# Altium PCB HBridge.PcbDoc
Units mil, origin at the board's own origin, x right, y up, seen from the top; angles counter-clockwise.
Board outline 2195 x 1561.19 mil, 4 copper layers (Top Layer, Second Layer, Third Layer, Fourth Layer), stack 59.526 mil thick; 54 components, 27 nets, 172 pads, 273 vias.
Unrouted connection lines stored in the file: 13.
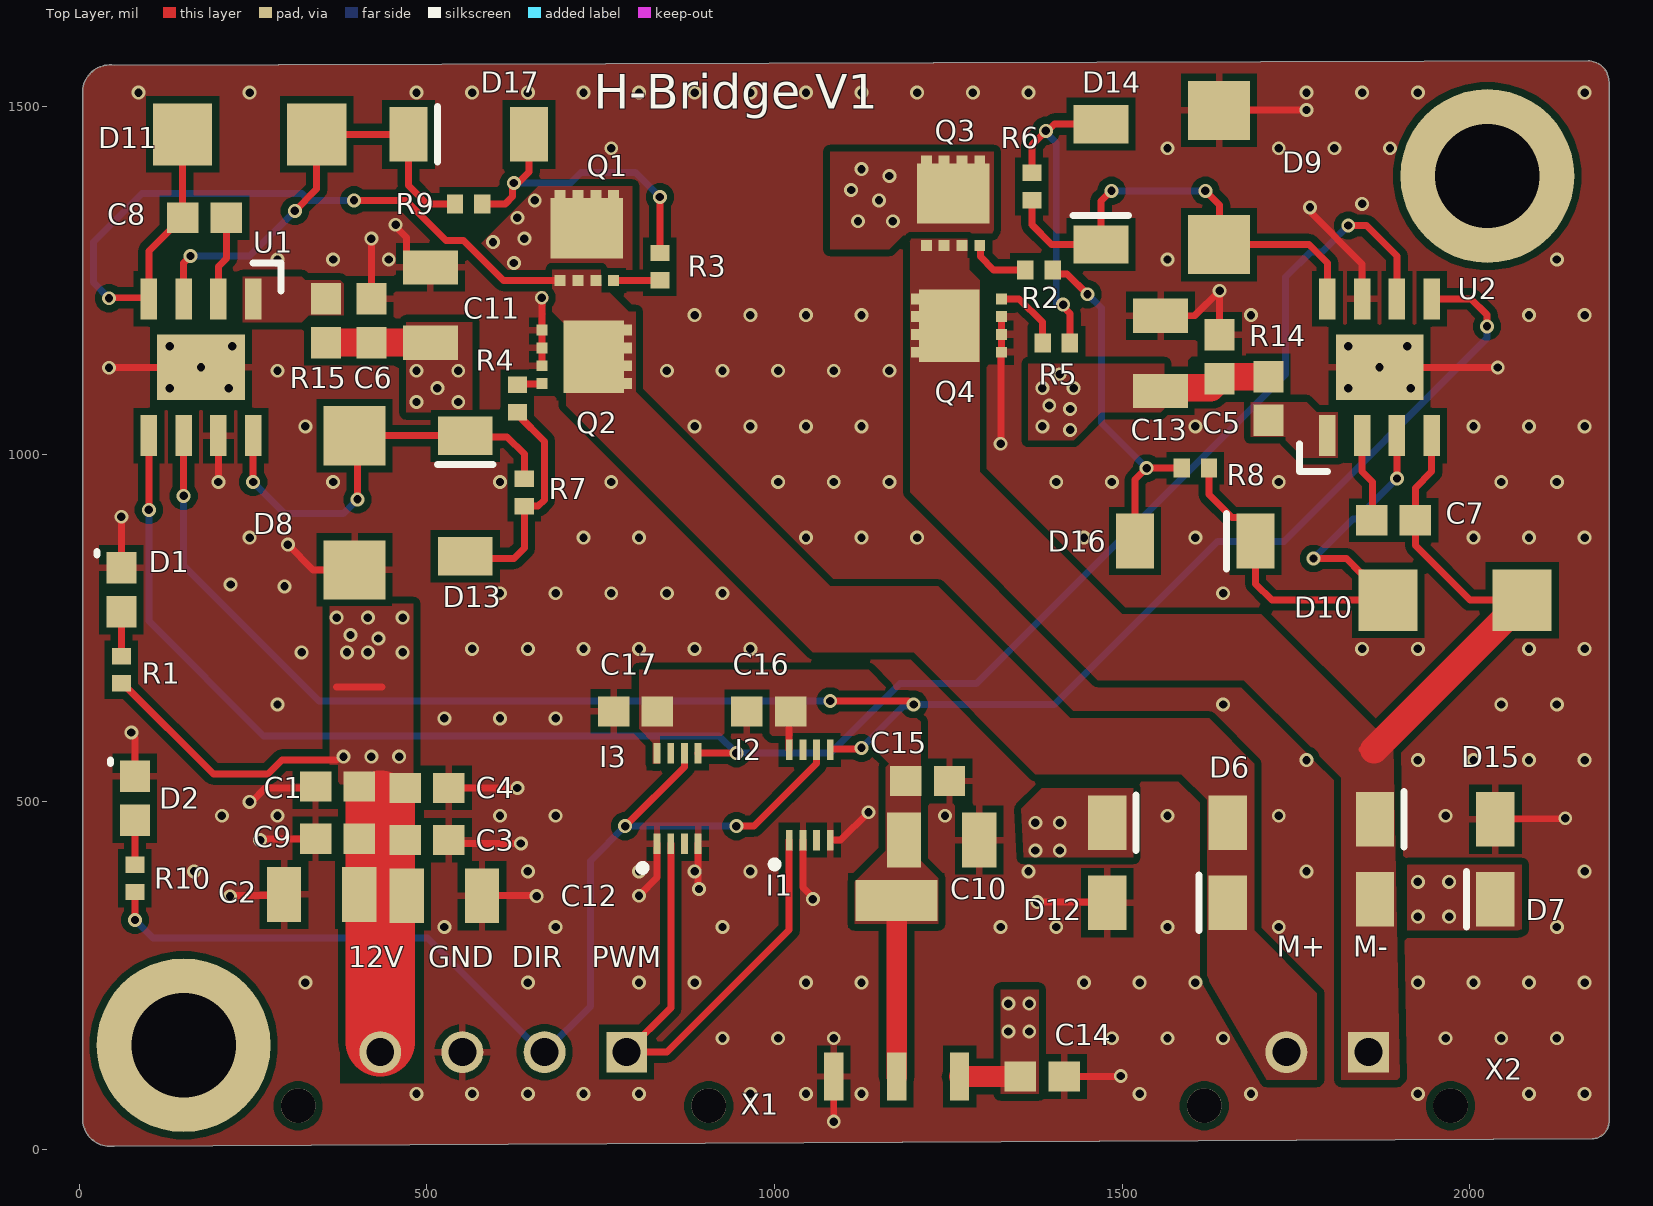
[diagram p0: Top Layer view]
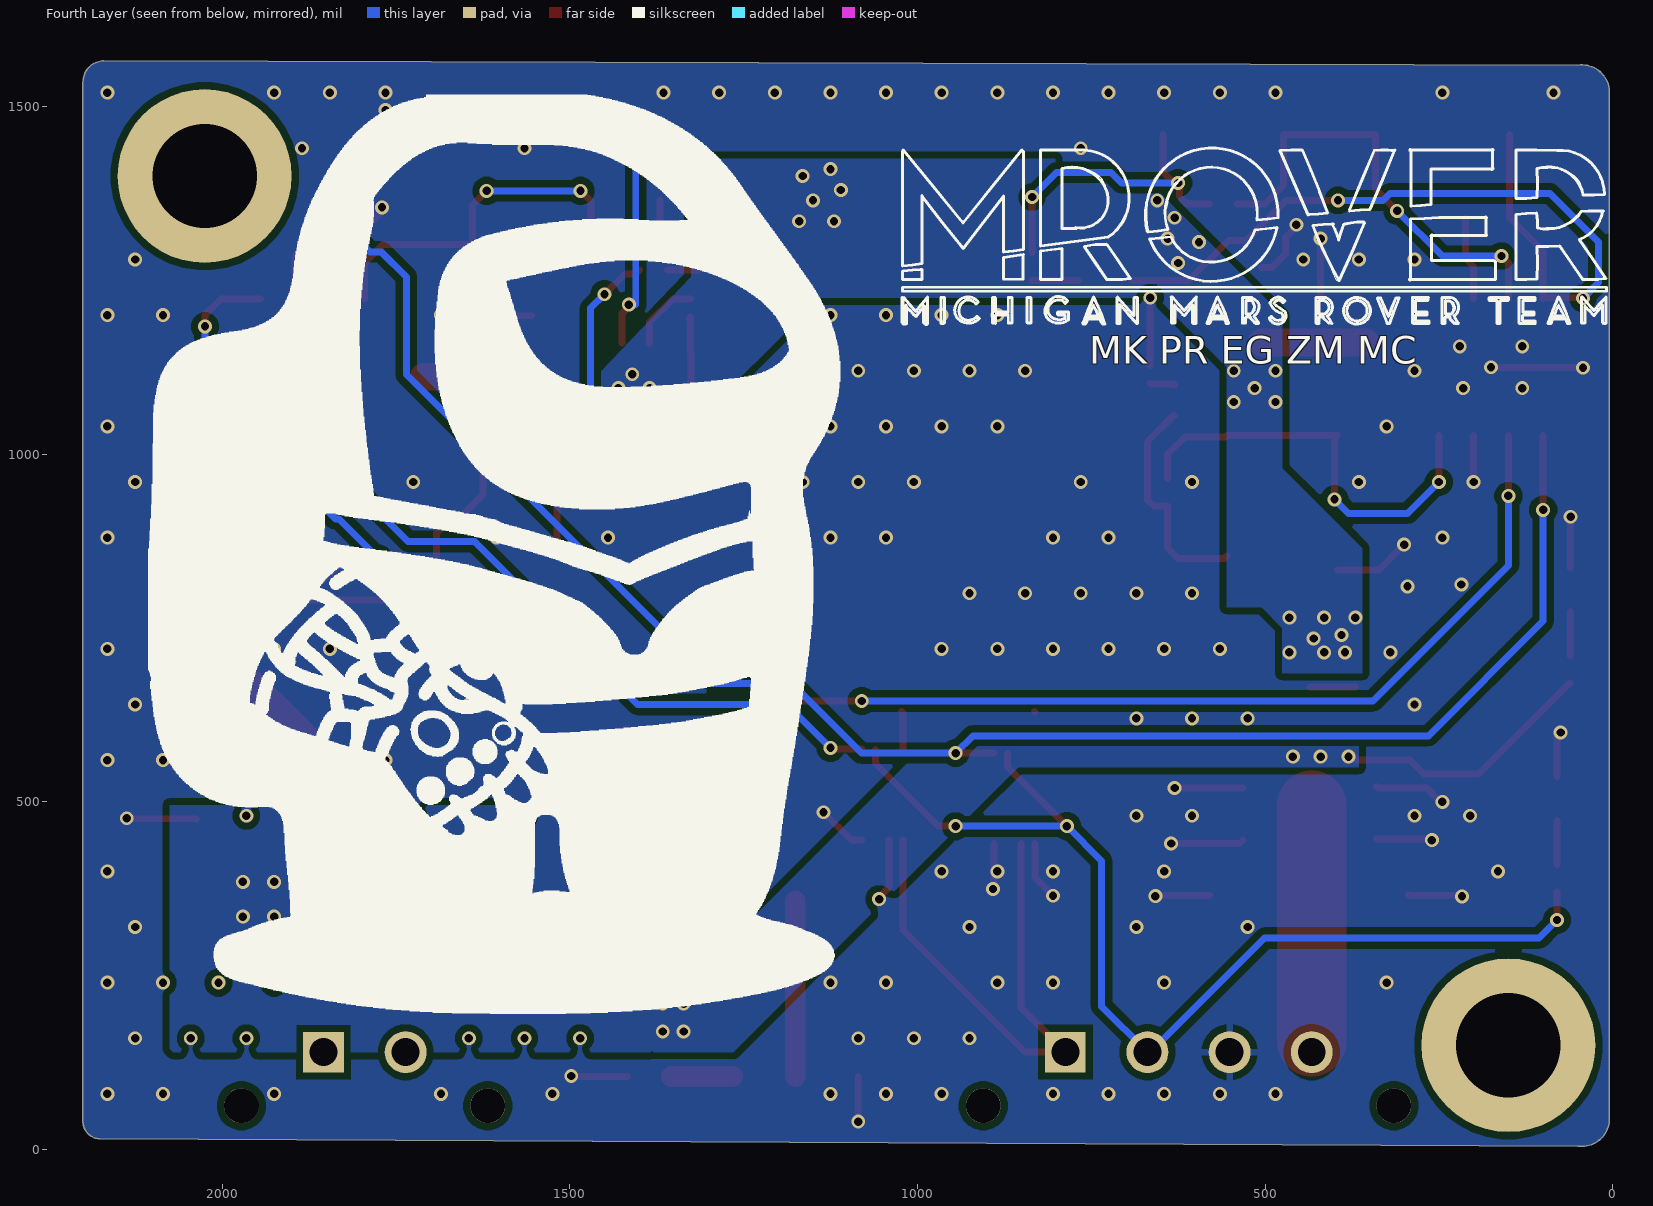
[diagram p1: Fourth Layer view, seen from below]
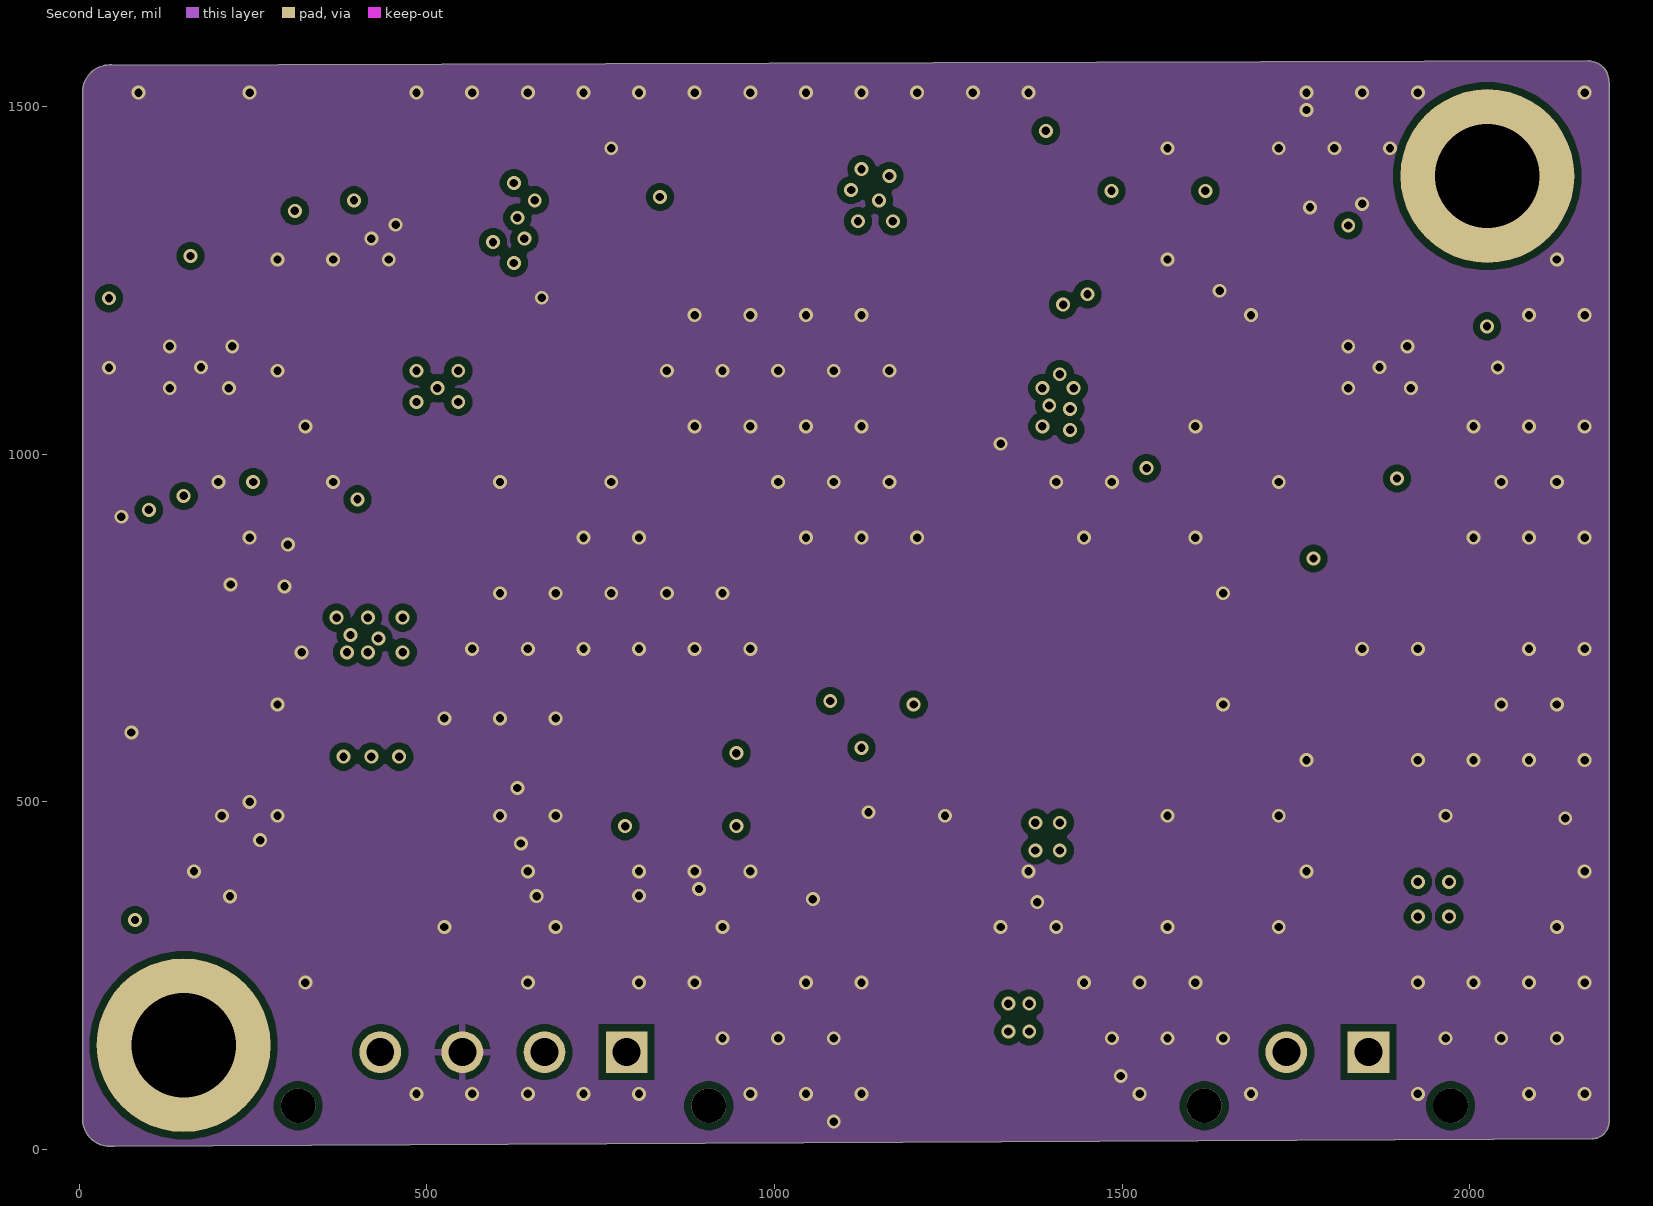
[diagram p2: Second Layer]
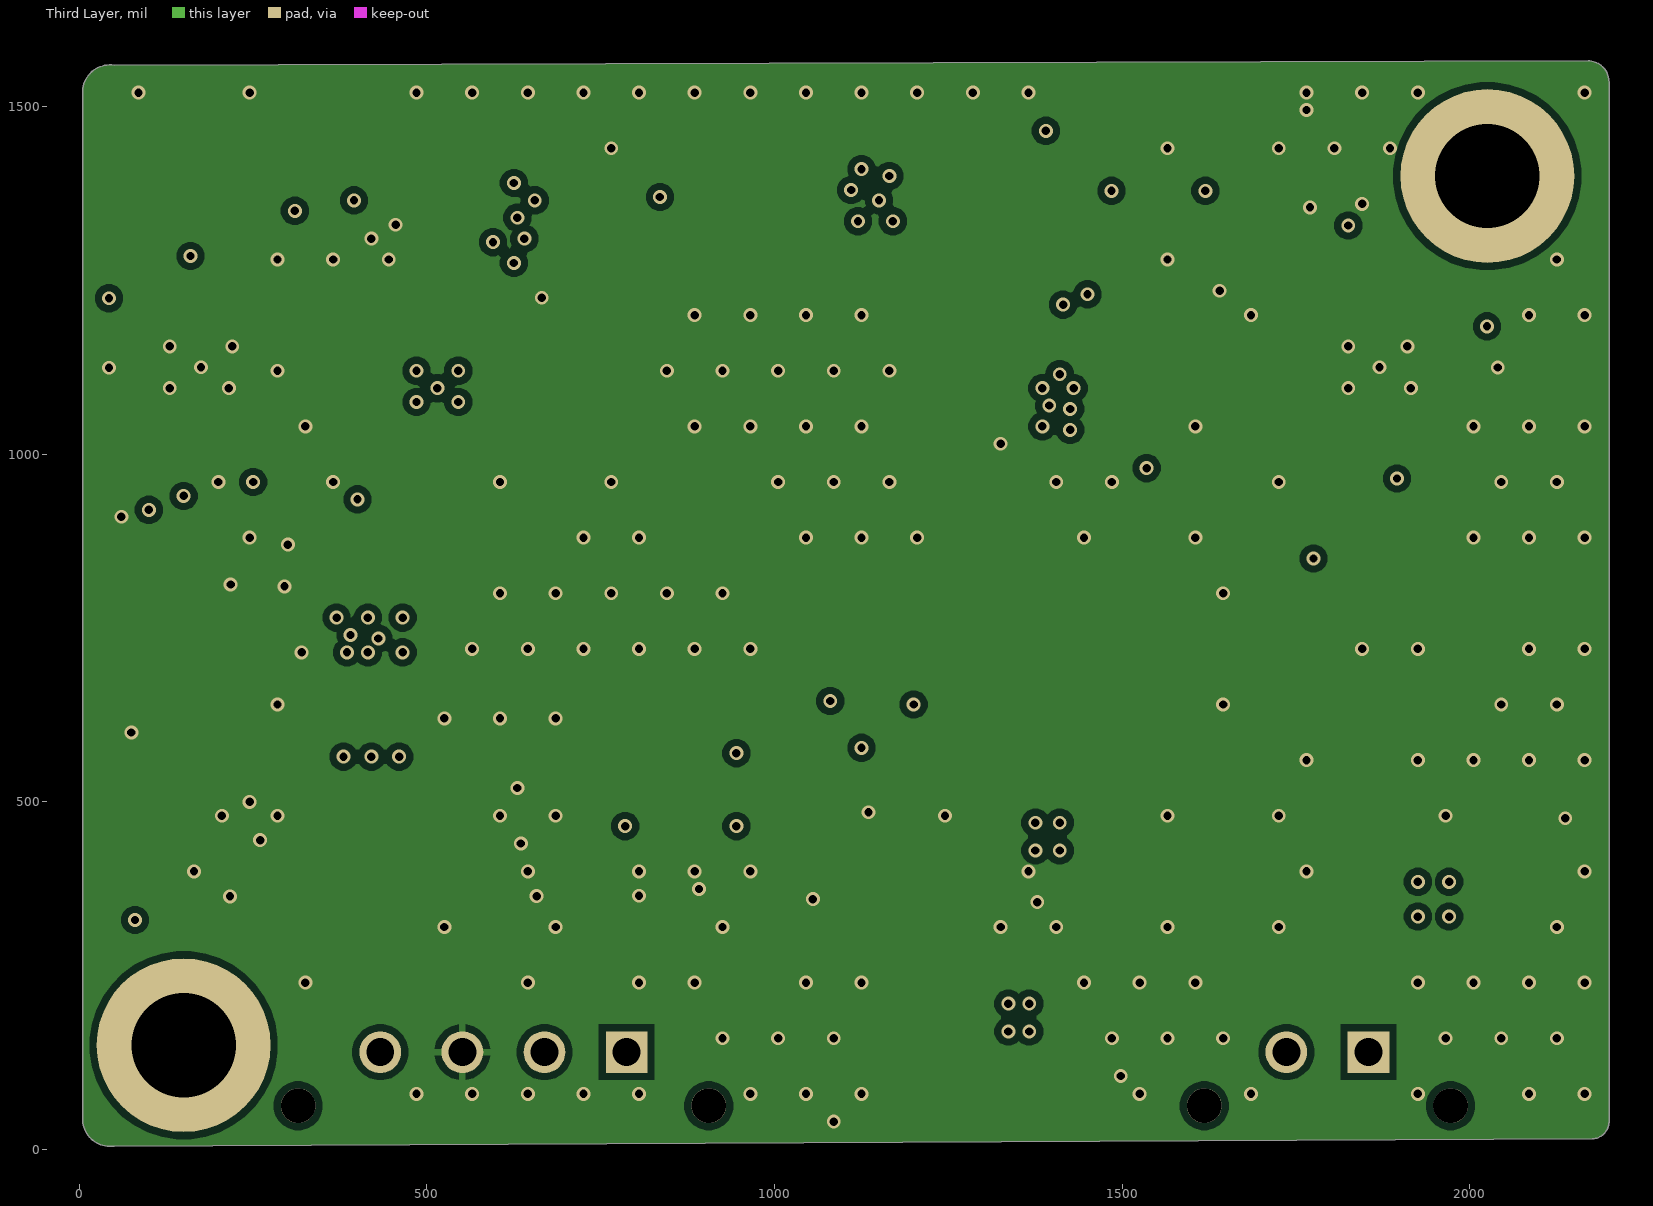
[diagram p3: Third Layer]
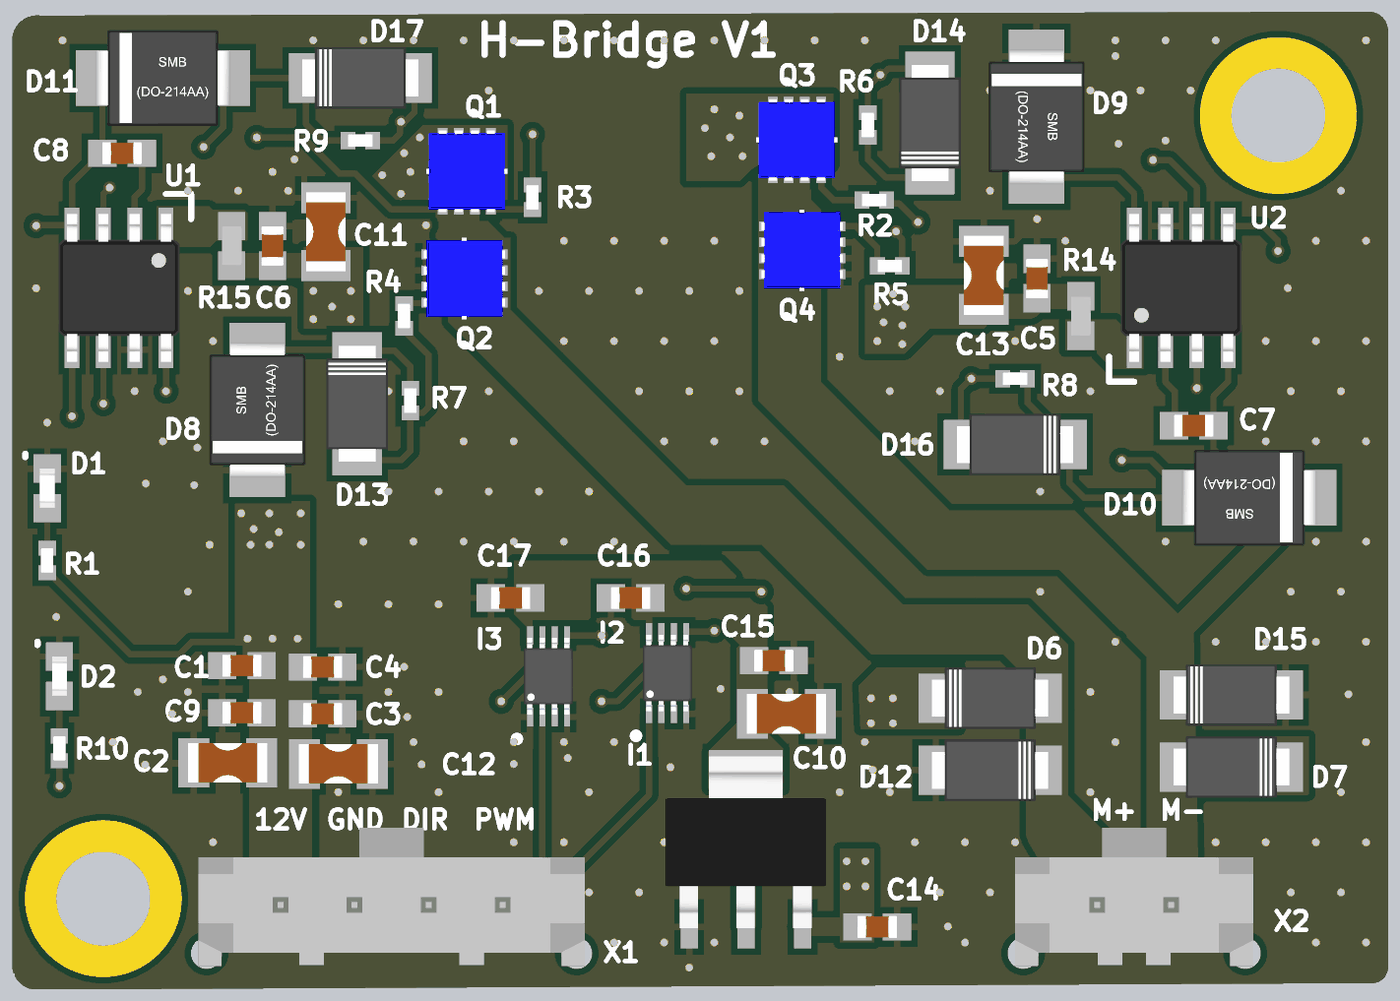
[diagram p4: 3D render of the assembled board from above, using the file's embedded part models]

## Layer stack, top to bottom
Top Solder: solder mask 0.4, Solder Resist, Dk 3.5
Top Layer: signal copper 1.4
Dielectric 2: prepreg 7.3, PP-006, Dk 4.16
Second Layer: signal copper 1.378
Dielectric 1: core 39.37, Core-009, Dk 4.5
Third Layer: signal copper 1.378
Dielectric 3: prepreg 7.3, PP-006, Dk 4.16
Fourth Layer: signal copper 1.4
Bottom Solder: solder mask 0.4, Solder Resist, Dk 3.5

## Board outline
5,38.52 5,1525.99 cw(c44.26,1520.25) 50,1559.52 2170,1565.78 cw(c2169.61,1535.39) 2200,1535 2200,41.77 cw(c2174.8,40.46) 2176.12,15.26 50,5 cw(c44.26,44.26)

## Design rules (kind name [scope] priority, off if disabled: settings)
Clearance [All] p1: gap=10 ignorepadtopadclearanceinfootprint=FALSE except(0: Arc-Hole Track-Hole SMDPad-Hole THPad-Hole Via-Hole Fill-Hole Poly-Hole Region-Hole Text-Hole; 8: Arc-Arc Arc-Track Track-Track; 9: Arc-SMDPad Track-SMDPad SMDPad-SMDPad)
HoleSize [All] p1: absolutevalues=TRUE maxlimit=200 minlimit=1 maxpercent=80.000 minpercent=20.000
PolygonConnect PolygonConnect_11 [All vs IsNamedPolygon('GND_L04_P035')] p1: thpad.connectstyle=Relief thpad.reliefconductorwidth=10 thpad.reliefentries=4 thpad.polygonreliefangle="90 Angle" thpad.airgapwidth=10 smdpad.connectstyle=Relief smdpad.reliefconductorwidth=10 smdpad.reliefentries=4 smdpad.polygonreliefangle="90 Angle" smdpad.airgapwidth=10 via.connectstyle=Direct via.reliefconductorwidth=10 via.reliefentries=4 via.polygonreliefangle="90 Angle" via.airgapwidth=10
PolygonConnect PolygonConnect_10 [All vs IsNamedPolygon('GND_L03_P033')] p2: thpad.connectstyle=Relief thpad.reliefconductorwidth=10 thpad.reliefentries=4 thpad.polygonreliefangle="90 Angle" thpad.airgapwidth=10 smdpad.connectstyle=Relief smdpad.reliefconductorwidth=10 smdpad.reliefentries=4 smdpad.polygonreliefangle="90 Angle" smdpad.airgapwidth=10 via.connectstyle=Direct via.reliefconductorwidth=10 via.reliefentries=4 via.polygonreliefangle="90 Angle" via.airgapwidth=10
PolygonConnect PolygonConnect_9 [All vs IsNamedPolygon('GND_L02_P034')] p3: thpad.connectstyle=Relief thpad.reliefconductorwidth=10 thpad.reliefentries=4 thpad.polygonreliefangle="90 Angle" thpad.airgapwidth=10 smdpad.connectstyle=Relief smdpad.reliefconductorwidth=10 smdpad.reliefentries=4 smdpad.polygonreliefangle="90 Angle" smdpad.airgapwidth=10 via.connectstyle=Direct via.reliefconductorwidth=10 via.reliefentries=4 via.polygonreliefangle="90 Angle" via.airgapwidth=10
PolygonConnect PolygonConnect_8 [All vs IsNamedPolygon('GND_L01_P037')] p4: thpad.connectstyle=Relief thpad.reliefconductorwidth=10 thpad.reliefentries=4 thpad.polygonreliefangle="90 Angle" thpad.airgapwidth=10 smdpad.connectstyle=Relief smdpad.reliefconductorwidth=10 smdpad.reliefentries=4 smdpad.polygonreliefangle="90 Angle" smdpad.airgapwidth=10 via.connectstyle=Direct via.reliefconductorwidth=10 via.reliefentries=4 via.polygonreliefangle="90 Angle" via.airgapwidth=10
PolygonConnect PolygonConnect_7 [All vs IsNamedPolygon('GND_L04_P035')] p5: thpad.connectstyle=Relief thpad.reliefconductorwidth=10 thpad.reliefentries=4 thpad.polygonreliefangle="90 Angle" thpad.airgapwidth=10 smdpad.connectstyle=Relief smdpad.reliefconductorwidth=10 smdpad.reliefentries=4 smdpad.polygonreliefangle="90 Angle" smdpad.airgapwidth=10 via.connectstyle=Direct via.reliefconductorwidth=10 via.reliefentries=4 via.polygonreliefangle="90 Angle" via.airgapwidth=10
PolygonConnect PolygonConnect_6 [All vs IsNamedPolygon('GND_L03_P033')] p6: thpad.connectstyle=Relief thpad.reliefconductorwidth=10 thpad.reliefentries=4 thpad.polygonreliefangle="90 Angle" thpad.airgapwidth=10 smdpad.connectstyle=Relief smdpad.reliefconductorwidth=10 smdpad.reliefentries=4 smdpad.polygonreliefangle="90 Angle" smdpad.airgapwidth=10 via.connectstyle=Direct via.reliefconductorwidth=10 via.reliefentries=4 via.polygonreliefangle="90 Angle" via.airgapwidth=10
PolygonConnect PolygonConnect_5 [All vs IsNamedPolygon('GND_L02_P034')] p7: thpad.connectstyle=Relief thpad.reliefconductorwidth=10 thpad.reliefentries=4 thpad.polygonreliefangle="90 Angle" thpad.airgapwidth=10 smdpad.connectstyle=Relief smdpad.reliefconductorwidth=10 smdpad.reliefentries=4 smdpad.polygonreliefangle="90 Angle" smdpad.airgapwidth=10 via.connectstyle=Direct via.reliefconductorwidth=10 via.reliefentries=4 via.polygonreliefangle="90 Angle" via.airgapwidth=10
PolygonConnect PolygonConnect_4 [All vs IsNamedPolygon('GND_L01_P037')] p8: thpad.connectstyle=Relief thpad.reliefconductorwidth=10 thpad.reliefentries=4 thpad.polygonreliefangle="90 Angle" thpad.airgapwidth=10 smdpad.connectstyle=Relief smdpad.reliefconductorwidth=10 smdpad.reliefentries=4 smdpad.polygonreliefangle="90 Angle" smdpad.airgapwidth=10 via.connectstyle=Direct via.reliefconductorwidth=10 via.reliefentries=4 via.polygonreliefangle="90 Angle" via.airgapwidth=10
PolygonConnect PolygonConnect_3 [All vs IsNamedPolygon('GND_L04_P035')] p9: connectstyle=Relief reliefconductorwidth=10 reliefentries=4 polygonreliefangle="90 Angle" airgapwidth=10
PolygonConnect PolygonConnect_2 [All vs IsNamedPolygon('GND_L03_P033')] p10: connectstyle=Relief reliefconductorwidth=10 reliefentries=4 polygonreliefangle="90 Angle" airgapwidth=10
PolygonConnect ReliefConnect [All vs IsNamedPolygon('GND_L02_P034')] p11: connectstyle=Relief reliefconductorwidth=10 reliefentries=4 polygonreliefangle="90 Angle" airgapwidth=10
PolygonConnect PolygonConnect_1 [All vs IsNamedPolygon('GND_L01_P037')] p12: connectstyle=Relief reliefconductorwidth=10 reliefentries=4 polygonreliefangle="90 Angle" airgapwidth=10
PolygonConnect [All] p13: connectstyle=Direct reliefconductorwidth=10 reliefentries=4 polygonreliefangle="90 Angle" airgapwidth=10
RoutingVias [All] p1: holewidth=28 width=50 viastyle="Through Hole" minholewidth=28 minwidth=50 maxholewidth=28 maxwidth=50
SolderMaskExpansion SolderMaskExpansion_2 [isViA] p1: expansion=4 istentingtop=TRUE
Width [All] p1: maxlimit=150 minlimit=10 preferedwidth=10 midlayer1_maxwidth=10 midlayer2_maxwidth=10 bottomlayer_maxwidth=100 minimp=50.000000 maximp=50.000000 favimp=50.000000
29 further rules are at their usual default settings.

## Classes and differential pairs
component class HBridge_Top_Level: C10 C14 C15 C16 C17 D1 D2 I1 I2 I3 R1 R10 X2
component class HBridge_Design: C1 C2 C3 C4 C5 C6 C7 C8 C9 C11 C12 C13 D6 D7 D8 D9 D10 D11 D12 D13 D14 D15 D16 D17 Q1 Q2 Q3 Q4 R2 R3 R4 R5 R6 R7 R8 R9 R14 R15 U1 U2

## Components (designator, comment, footprint, x,y, rotation, side; value= is the part's Value field where it differs from the comment)
C1 "CC0603KRX7R0BB104" CAP-0603 371.18,521.88 r180 top
C2 "CAP-1U-0001" "CAP-1206 - duplicate" 353.54,366.88 r180 top
C3 "C1608C0G2A103J080AC" CAP-0603 500,445 r0 top
C4 "CAP-1N-0001" CAP-0603 500,520 r0 top
C5 "C1608C0G2A103J080AC" CAP-0603 1640,1140 r90 top
C6 "C1608C0G2A103J080AC" CAP-0603 420,1191.93 r90 top
C7 "CC0603KRX7R0BB104" CAP-0603 1890,905 r0 top
C8 "CC0603KRX7R0BB104" CAP-0603 180,1340 r180 top
C9 "C1608C0G2A103J080AC" CAP-0603 371.18,446.88 r180 top
C10 "CL31B106KBHNNNE" CAP-1206 1240,445 r0 top
C11 "CAP-1U-0001" "CAP-1206 - duplicate" 505,1209.57 r90 top
C12 "CAP-1U-0001" "CAP-1206 - duplicate" 520,365 r0 top
C13 "CAP-1U-0001" "CAP-1206 - duplicate" 1555,1140 r90 top
C14 "CC0603KRX7R0BB104" CAP-0603 1385,105 r0 top
C15 "CC0603KRX7R0BB104" CAP-0603 1220,530 r0 top
C16 "CC0603KRX7R0BB104" CAP-0603 991.5,630 r180 top
C17 "CC0603KRX7R0BB104" CAP-0603 800,630 r180 top
D1 "150060AS75000" LED-0603 60.48,805 r90 top
D2 "150060AS75000" LED-0603 80,505 r90 top
D6 "PMEG6030EP,115" DIO-SOD128 1565,470 r270 top
D7 "PMEG6030EP,115" DIO-SOD128 1950,360 r90 top
D8 "SMBJ12CA" "DO-214AA (SMBJ)" 395.8,888.78 r90 top
D9 "SMBJ12CA" "DO-214AA (SMBJ)" 1639.2,1439.31 r270 top
D10 "SMBJ12CA" "DO-214AA (SMBJ)" 2020,790 r180 top
D11 "SMBJ12CA" "DO-214AA (SMBJ)" 203.62,1460 r0 top
D12 "PMEG6030EP,115" DIO-SOD128 1565,355 r90 top
D13 "PMEG6030EP,115" DIO-SOD128 555,940 r180 top
D14 "PMEG6030EP,115" DIO-SOD128 1469.2,1388.12 r0 top
D15 "PMEG6030EP,115" DIO-SOD128 1950,475 r270 top
D16 "PMEG6030EP,115" DIO-SOD128 1605,875 r90 top
D17 "PMEG6030EP,115" DIO-SOD128 560,1460 r270 top
I1 "LD1117AS33TR" IC-SOT-223 1175,240 r0 top
I2 "SN74LVC2G157DCUR" IC-MUX-8VSSOP 1080,445 r90 top
I3 "SN74LVC2G157DCUR" IC-MUX-8VSSOP 890,440 r90 top
Q1 "TPN11006PL,LQ" NMOS-8TSON 730,1311.01 r0 top
Q2 "TPN11006PL,LQ" NMOS-8TSON 726.22,1140 r270 top
Q3 "TPN11006PL,LQ" NMOS-8TSON 1256.61,1361.02 r0 top
Q4 "TPN11006PL,LQ" NMOS-8TSON 1265,1185 r90 top
R1 "RC0402JR-07100RP" RES-0402 60.48,690 r90 top
R2 "RC0402JR-0733RP" RES-0402 1380,1265 r180 top
R3 "RC0402JR-0733RP" RES-0402 835,1269.68 r270 top
R4 "RC0402JR-0733RP" RES-0402 630,1080 r90 top
R5 "RC0402JR-0733RP" RES-0402 1405,1160 r0 top
R6 "RC0402JR-0733RP" RES-0402 1370,1385 r270 top
R7 "RC0402JR-0733RP" RES-0402 640,945 r90 top
R8 "RC0402JR-0733RP" RES-0402 1605,980 r0 top
R9 "RC0402JR-0733RP" RES-0402 560,1360 r180 top
R10 "RC0402JR-07100RP" RES-0402 80,390 r90 top
R14 "RNCP0603FTD1R00" RES-0603 1710,1080 r90 top
R15 "RNCP0603FTD1R00" RES-0603 355,1191.93 r270 top
U1 "UCC27284QDQ1" IC-BUCK-8SOIC 175,1125 r180 top
U2 "UCC27284QDQ1" IC-BUCK-8SOIC 1870,1125 r0 top
X1 "Molex 43650-0415" 43650-0415 610,140 r0 top (schematic designator X?)
X2 "Molex 43650-0215" 43650-0215 1795,140 r0 top

## Footprints (in the part's own frame and the unit in brackets; to place one, negate y for a bottom-side part, rotate by r counter-clockwise, add the part's x,y. Pads: shape width x height; smd on the part's side, far side on the other; paste and mask are expansions set on the pad)
43650-0215 [mil]
  round 50 hole 50 unplated: 1(-177.17,-77.17) 1(177.17,-77.17)
  rect 58.33x58.33 / inner rect 60x60 / far side rect 58.33x58.33 hole 40.16: P$1(59.06,0)
  round 60.24 / inner round 60 / far side round 60.24 hole 40.16: P$2(-59.06,0)
  body extent -190,-97 190,123, height 395
43650-0415 [mil]
  round 50 hole 50 unplated: 1(-295.28,-77.17) 1(295.28,-77.17)
  rect 58.33x58.33 / inner rect 60x60 / far side rect 58.33x58.33 hole 40.16: P$1(177.17,0)
  round 60.24 / inner round 60 / far side round 60.24 hole 40.16: P$2(59.06,0) P$3(-59.06,0) P$4(-177.17,0)
  body extent -308,-97 308,123, height 395
CAP-0603 [mm]
  rect 1.15x1.1 smd: 1(-0.8,0) 2(0.8,0)
  body extent -0.8,-0.45 0.8,0.45, height 0.8
CAP-1206 [mm]
  rect 1.25x2 smd: 1(-1.375,0) 2(1.375,0)
  body extent -1.6,-0.8 1.6,0.8, height 1.5
"CAP-1206 - duplicate" [mm]
  rect 1.25x2 smd: 1(-1.248,0) 2(1.502,0)
  body extent -1.47,-0.8 1.73,0.8, height 1.5
DIO-SOD128 [mm]
  rect 2x1.4 smd: 1(0,2.2) 2(0,-2.2)
  silkscreen extent -1.02,-1.14 1.02,-1.14, body extent -1.25,-2.35 1.25,2.35, height 1.05
"DO-214AA (SMBJ)" [mm]
  rect 2.16x2.26 smd: 1(-1.4,0) 2(3.5,0)
  body extent -1.7,-1.95 3.8,1.95, height 2.45
IC-BUCK-8SOIC [mm]
  rect 0.6x1.5 smd: 1(-1.905,-2.5) 2(-0.635,-2.5) 3(0.635,-2.5) 4(1.905,-2.5) 5(1.905,2.5) 6(0.635,2.5) 7(-0.635,2.5) 8(-1.905,2.5)
  rect 3.2x2.4 smd: 9(0,0)
  silkscreen extent -2.92,-3.81 -1.9,-2.79, body extent -2.45,-3 2.45,3, height 1.75
IC-MUX-8VSSOP [mm]
  rect 0.75x0.25 smd: 1(0,1.5) 2(0,1) 3(0,0.5) 4(0,0) 5(3.3,0) 6(3.3,0.5) 7(3.3,1) 8(3.3,1.5)
  silkscreen extent -1.02,1.91 -0.76,2.16, body extent 0.1,-0.24 3.2,1.76, height 0.9
IC-SOT-223 [mm]
  rect 0.7x1.75 smd: 1(2.314,-3.429) 2(0.014,-3.429) 3(-2.286,-3.429)
  rect 3x1.5 smd: 2(0,3)
  body extent -3.25,-3.48 3.25,3.48, height 1.7
LED-0603 [mm]
  rect 1.15x1.1 smd: 1(-0.8,0) 2(0.8,0)
  silkscreen extent 1.27,0.89 1.4,0.89, body extent -0.8,-0.3 0.8,0.3, height 1
NMOS-8TSON [mm]
  rect 0.4x0.4 smd: 1(0.975,-1.55) 2(-0.975,-1.55) 2(-0.325,-1.55) 2(0.325,-1.55)
  rect 0.4x0.3 smd: 3(-0.975,1.6) 3(-0.325,1.6) 3(0.325,1.6) 3(0.975,1.6)
  rect 2.65x2.2 smd: 3(0,0.35)
  body extent -1.65,-1.65 1.65,1.65, height 0.85
RES-0402 [mm]
  rect 0.6x0.7 smd: 1(-0.5,0) 2(0.5,0)
  body extent -0.5,-0.25 0.5,0.25, height 0.3
RES-0603 [mm]
  rect 1.15x1.1 smd: 1(-0.8,0) 2(0.8,0)
  body extent -0.8,-0.4 0.8,0.4, height 0.43

## Part data
C1 C7 C8 C14 C15 C16 C17: library part CAP-100N-0001, "CAP CER 0.1UF 100V X7R 0603", Capacitance="100nF +/-10%", Manufacturer=YAGEO, Package Size=0603, Temperature Coefficient=X7R, Voltage Rating=100V, assembled?=no, Manufacturer Part Number=CC0603KRX7R0BB104
C2 C11 C12 C13: "1 µF ±10% 100V Ceramic Capacitor X7R 1206 (3216 Metric)", Capacitance="1 uF +/- 10%", Voltage=100V
C3 C5 C6 C9: library part CAP-10N-0002, "CAP CER 10000PF 100V C0G 0603", Capacitance="10nF +/-5%", Manufacturer="TDK Corporation", Package Size=0603, Temperature Coefficient=C0G/NP0, Voltage Rating=100V, assembled?=no, Manufacturer Part Number=C1608C0G2A103J080AC
C4: "1000 pF ±10% 100V Ceramic Capacitor X7R 0603 (1608 Metric)", Capacitance="1 nF +/-10%", Voltage=100V
C10: library part CAP-10U-0001, "10 µF ±10% 50V Ceramic Capacitor X7R 1206 (3216 Metric)", Capacitance="10uF +/-20%", Manufacturer="Samsung Electro-Mechanics", Package Size=1206, Temperature Coefficient=X7R, Voltage Rating=50V, assembled?=no, Manufacturer Part Number=CL31B106KBHNNNE
D1 D2: library part LED_Amber_0001, "CAP CER 0.1UF 100V X7R 0603", Color=Amber, Current Rating=20mA, Manufacturer="Wurth Electronik", Package Size=0603, assembled?=no, Manufacturer Part Number=150060AS75000, Vf=2V
D6 D7 D12 D13 D14 D15 D16 D17: library part DIO-0.53V-0001, "Diode Schottky 60 V 3A Surface Mount SOD-128/CFP5", Current Rating=3A, Manufacturer="Nexperia USA Inc.", Package=SOD-128/CFP5, Vf (Voltage Forward)="530 mV", Assembled=no, Manufacturer Part Number=PMEG6030EP,115
D8 D9 D10 D11: library part DIO-19.9V-0001, "19.9V Clamp 30.2A Ipp Tvs Diode Surface Mount DO-214AA (SMBJ)", Breakdown Voltage=13.3, Current Rating=30.2A, Manufacturer="Littlefuse Inc.", Package="DO-214AA (SMBJ)", Standoff Voltage=12V, Assembled=No, Manufacturer Part Number=SMBJ12CA
I1: library part IC-LDO-0001, "Linear Voltage Regulator IC Positive Fixed 1 Output 1A SOT-223", Manufacturer Part Number=LD1117AS33TR, VIn Max=15V, Vout=3.3V
I2: library part IC-MUX-0001
I3: library part IC-MUX-0001, "Multiplexer 1 x 2:1 8-VSSOP", Manufacturer Part Number=SN74LVC2G157DCUR, Vin=1.65-5.5V
Q1 Q2 Q3 Q4: library part NMOS-26A-0001, "MOSFET N-CH 60V 200MA SOT23", Manufacturer=Toshiba, Package="8-TSON Advance", assembled?=no, FET type=N-Channel, Id-Continuous=26A, Manufacturer Part Number=TPN11006PL,LQ, Rds On-Max=18.1mOhm, VDS-Max=60V, Vgs-Max=20V
R1: library part RES-1K-0001, "RES SMD 1K OHM 5% 1/16W 0402", Manufacturer=YAGEO, Manufacturer Part Number=RC0402JR-071KP, Package Size=0402, Power Rating=1/16W, Resistance="1kOhm +/-5%", assembled?=no
R2 R3 R4 R5 R6 R7 R8 R9: library part RES-33-0001, "RES SMD 33 OHM 5% 1/16W 0402", Manufacturer=YAGEO, Package Size=0402, Power Rating=1/16W, Resistance="33Ohm +/-5%", assembled?=no, Manufacturer Part Number=RC0402JR-0733RP
R10: library part RES-100-0001, "RES SMD 100 OHM 5% 1/16W 0402", Manufacturer=YAGEO, Package Size=0402, Power Rating=1/16W, Resistance="100Ohm +/-5%", assembled?=no, Manufacturer Part Number=RC0402JR-07100RP
R14 R15: library part RES-1-0001, "1 Ohms ±1% 0.125W, 1/8W Chip Resistor 0603 (1608 Metric) Anti-Sulfur Thin Film", Power="1/8 W", Resistance="1 Ohms ±1%"
U1 U2: library part IC-GDRV-0001, "Gate Drivers Automotive 3-A, 120-V half bridge gate driver with 5-V UVLO and enable 8-SOIC -40 to 125", Load Voltage-Max=120V, Manufacturer="Texas Instruments", Package=SOIC-8, Supply Current=3A, assembled?=no, Manufacturer Part Number=UCC27284QDQ1, VCC-Max=16V, VCC-Min=5.5V
X1: library part "Micro-Fit Molex 4 Pin Vertical", Package=43650-0415, DeviceName=43650-0415, DeviceSetName=HEADER_POS4_?, GateName_1=G$1, LibraryName=con-molex-micro-fit-3_0_2, SymbolName_1=HEADER_POS4
X2: library part "Micro-Fit Molex 2 Pin Vertical", Package=43650-0215, DeviceName=43650-0215, DeviceSetName=HEADER_POS2_?, GateName_1=G$1, LibraryName=con-molex-micro-fit-3_0_2, SymbolName_1=HEADER_POS2

## Free pads (board coordinates)
  round 250 hole 150: ""(150,150) ""(2025,1400)

## Via types
v1: diameter 20, hole 12, Top Layer to Fourth Layer, tented both sides, 273 vias

## Nets (pads, with @x,y where several pads share a name; then routed paths per layer and width w, separated by ;. In a path a pad name is that pad's centre, name@x,y a point inside that pad or via, vN(x,y) a via of type N, cw(c..) or ccw(c..) an arc to the next point about the centre after c; other vN are vias at no path point)
3.3V: C10.1 C15.1 C16.1 C17.1 I1.2 I2.8 I3.8 | length 309.3
  Top Layer w10: C17.1@830.94,629.45 C17.1 ; I2.8 1020.94,627.95 C16.1
  Top Layer w30: I1.2@1175.55,105 I1.2@1175.55,357.56
12V: C1.1 C2.1 C3.1 C4.1 C5.1 C6.1 C9.1 C11.1 C12.1 C13.1 C14.1 D6.2 D7.2 I1.1 Q1.3 Q3.3 R1.1 R14.2 R15.2 X1.P$4 | length 1208.1
  Top Layer w10: R1.1 62.45,670.32 192.76,540 271.38,540 291.38,560 370,560 ; 370,665 435,665 ; C1.1@415,520 C1.1@415.66,519.34 ; C4.1@447.83,500.31 467.52,520 C4.1 ; C5.1 C5.1@1642.99,1111.5
  Top Layer w30: I1.1 C14.1
  Top Layer w40: R15.2 C6.1 C11.1 ; C13.1 1559.61,1095.47 1626.97,1095.47 1637.36,1105.87 1638.35,1105.87 1640,1107.52 C5.1 ; C5.1@1642.99,1111.5 R14.2
  Top Layer w100: X1.P$4@432.83,155 432.83,495
  other v1: 1336.15,169.71 1366.15,169.71 1336.15,209.71 1366.15,209.71 1925,335 1970,335 1925,385 1970,385 1375,430 1410,430 1375,470 1410,470 380,565 420,565 460,565 385,715 415,715 465,715 430,735 390,740 370,765 415,765 465,765 1425,1035 1385,1040 1425,1065 1395,1070 485,1075 545,1075 515,1095 1385,1095 1430,1095 1410,1115 485,1120 545,1120 625,1275 595,1305 640,1310 1120,1335 1170,1335 630,1340 655,1365 1150,1365 1110,1380 1165,1400 1125,1410
DIR_1: I2.6 I3.6 R10.1 X1.P$2 | length 1553.9
  Top Layer w10: v1(80,330) R10.1 ; v1(785,465) 785.19,465 870.24,550.04 870.24,569.84 I3.6 ; v1(945,465) 970.19,465 1060.24,555.04 1060.24,574.84 I2.6
  Fourth Layer w10: v1(80,330) 105.96,304.04 500.6,304.04 664.64,140 X1.P$2 735,205.94 735,415 v1(785,465) v1(945,465)
DIR_1_In: I3.5 U1.5 U2.6 | length 2671.8
  Top Layer w10: v1(100,920) U1.5 ; I3.5 890.04,569.96 v1(945,570) v1(945,570) ; v1(1825,1328.98) 1851.02,1328.98 1895,1285 U2.6
  Fourth Layer w10: v1(100,920) 100,760 265,595 920,595 v1(945,570) 1080.36,570 1180.36,670 1290.46,670 1735,1114.54 1735,1255 1771.03,1291.03 1787.05,1291.03 v1(1825,1328.98)
DIR_2_In: I2.5 U1.6 U2.5 | length 2632.5
  Top Layer w10: v1(150,940) U1.6 ; I2.5 1080,576.24 1080.08,576.31 1123.61,576.31 v1(1125,577.71) ; v1(1080,645) 1192.29,645 1197.29,640 v1(1200,640) ; U2.5 2001.57,1223.43 2024.44,1200.56 v1(2024.44,1183.79)
  Fourth Layer w10: v1(150,940) 150,840 345,645 v1(1080,645) ; v1(1125,577.71) 1185.38,638.09 1198.09,638.09 v1(1200,640) 1402.34,640 1636.91,874.57 1732.27,874.57 2024.44,1166.74 v1(2024.44,1183.79)
GND: C1.2 C2.2 C3.2 C4.2 C5.2 C6.2 C9.2 C10.2 C11.2 C12.2 C13.2 C14.2 C15.2 C16.2 C17.2 D1.2 D2.2 D8.1 D9.1 D12.1 D15.1 I1.3 I2.2 I2.4 I3.1 I3.4 Q2.2 Q4.2 U1.7 U1.9 U2.7 U2.9 X1.P$3 | length 2744.6
  Top Layer w10: v1@40,1125 v1(175,1125) ; D1.2 v1(60.48,910) ; v1(74.82,599.82) 74.82,597.12 80,591.94 D2.2 ; v1(200,960) U1.7 ; v1@220.18,365.35 292.88,365.35 C2.2 ; v1(245,500) 247.43,500 267.43,520 337.81,520 C1.2 ; v1@261.88,446.88 C9.2 ; v1(300,870) 336.34,833.66 D8.1 ; C6.2 v1(420,1310) ; v1(455,1330) 455,1327.29 470.63,1311.66 470.63,1288.31 490.24,1268.7 C11.2 ; C3.2 536.5,440 v1(635,440) ; C4.2 v1(630,520) ; C12.2 655,365 655.69,364.31 v1(657.78,364.31) ; v1(665,1224.99) 665.1,1224.89 665.1,1178.48 665.2,1178.39 665.2,1152.8 Q2.2@665.2,1127.2 ; v1(805,365) 830.94,390.94 I3.1 ; v1@890,375 I3.4 ; I2.2 1040.63,377.08 1055,362.71 v1(1055,360) ; I2.4 1095,445 v1(1135,485) ; v1(1085,40) I1.3 ; v1(1325,1015) 1325.51,1015.51 1325.51,1146.1 1326.02,1146.61 1326.02,1172.2 1326.02,1197.8 Q4.2@1328.74,1195.08 ; v1(1377.73,355.68) 1378.41,355 1380,355 1380.68,355.68 1477.71,355.68 D12.1 ; C14.2 v1@1500,105 ; C13.2 1604.13,1199.13 v1(1640,1235) C5.2 ; D9.1 1639.77,1495 v1(1765,1495) ; v1(1770,1355) 1771.91,1353.09 1771.91,1346.71 1845,1273.62 U2.7 ; v1(1870,1125) 2032.29,1125 2035.38,1121.91 2037.29,1121.91 v1(2040,1124.62) ; D15.1 2037.29,475.68 2139.32,475.68 v1@2140,475
  other v1: 485,80 565,80 645,80 725,80 805,80 965,80 1045,80 1125,80 1525,80 1685,80 1925,80 2085,80 2165,80 1497.73,105.68 925,160 1005,160 1085,160 1485,160 1565,160 1645,160 1965,160 2045,160 2125,160 325,240 645,240 805,240 885,240 1045,240 1125,240 1445,240 1525,240 1605,240 1925,240 2005,240 2085,240 2165,240 525,320 685,320 925,320 1325,320 1405,320 1565,320 1725,320 2125,320 216.79,364.01 891.15,374.71 165,400 645,400 805,400 885,400 965,400 1365,400 1765,400 2165,400 260,445 2137.06,476.35 205,480 285,480 605,480 685,480 1245,480 1565,480 1725,480 1965,480 1765,560 1925,560 2005,560 2085,560 2165,560 525,620 605,620 685,620 285,640 1645,640 2045,640 2125,640 319.64,715 565,720 645,720 725,720 805,720 885,720 965,720 1845,720 1925,720 2085,720 2165,720 605,800 685,800 765,800 845,800 925,800 1645,800 295,810 217.68,812.68 245,880 725,880 805,880 1045,880 1125,880 1205,880 1445,880 1605,880 2005,880 2085,880 2165,880 365,960 605,960 765,960 1005,960 1085,960 1165,960 1405,960 1485,960 1725,960 2045,960 2125,960 325,1040 885,1040 965,1040 1045,1040 1125,1040 1605,1040 2005,1040 2085,1040 2165,1040 130,1095 215,1095 1825,1095 1915,1095 285,1120 845,1120 925,1120 1005,1120 1085,1120 1165,1120 42.78,1124.31 130,1155 220,1155 1825,1155 1910,1155 885,1200 965,1200 1045,1200 1125,1200 1685,1200 2085,1200 2165,1200 285,1280 365,1280 445,1280 1565,1280 2125,1280 1845,1360 765,1440 1565,1440 1725,1440 1805,1440 1885,1440 85,1520 245,1520 485,1520 565,1520 645,1520 725,1520 805,1520 885,1520 965,1520 1045,1520 1125,1520 1205,1520 1285,1520 1365,1520 1765,1520 1845,1520 1925,1520 2165,1520
HO_1G: D11.2 D17.2 R9.2 U1.3 | length 649
  Top Layer w10: U1.3 150,1275 v1(160,1285) ; v1(310,1350) 341.42,1381.42 D11.2 D17.2 473.39,1386.61 500,1360 R9.2
  Fourth Layer w10: v1(160,1285) 245,1285 v1(310,1350)
HO_1M: Q1.1 R3.2 | length 66.6
  Top Layer w10: Q1.1 R3.2
HO_2G: D10.2 D16.2 R8.2 U2.3 | length 763.8
  Top Layer w10: R8.2 1624.68,941.93 1657.54,909.07 1669.06,909.07 1691.61,886.51 D16.2 1691.61,813.39 1715,790 D10.2 1882.2,791.97 1844.68,829.49 1842.72,829.49 1822.2,850 v1(1775,850) ; v1(1895,965) U2.3
  Fourth Layer w10: v1(1775,850) 1831.82,906.82 1836.82,906.82 v1(1895,965)
HO_2M: Q3.1 R2.2 | length 89.5
  Top Layer w10: Q3.1@1295,1300.92 1295.98,1299.94 1295.98,1284.02 1315,1265 R2.2
LO_1: D8.2 D13.2 R7.2 U1.8 | length 627.3
  Top Layer w10: v1(250,960) U1.8 ; v1(400,935) 400,1022.38 D8.2 D13.2 ; D13.2 556.61,1025 615,1025 640,1000 R7.2
  Fourth Layer w10: v1(250,960) 295,915 380,915 v1(400,935)
LO_2: D9.2 D14.2 R6.2 U2.8 | length 671.9
  Top Layer w10: R6.2 1370,1330 1398.49,1301.51 D14.2 1469.2,1364.2 v1@1485,1380 ; v1(1619.44,1378.79) 1640,1358.22 1640,1302.31 D9.2 1768.49,1301.51 1795,1275 U2.8
  Fourth Layer w10: v1(1484.44,1378.79) 1618.79,1378.79 v1@1620,1380
M+: C8.2 D6.1 D11.1 D12.2 Q1.2 Q2.3 U1.4 X2.P$2 | length 1164
  Top Layer w10: v1@40,1225 98.43,1225 U1.4 100,1292.48 147.52,1340 C8.2 D11.1 ; v1(395,1365) 469.54,1365 527.24,1307.31 552.69,1307.31 610.01,1249.99 Q1.2@691.61,1249.99 ; Q2.3@740,1140 Q2.3@742.8,1142.8
  Fourth Layer w10: v1(42.78,1224.31) 20.24,1246.84 20.24,1305 90.24,1375 320.36,1375 330.36,1365 v1(395,1365)
M-: C7.2 D7.1 D10.1 D15.2 Q3.2 Q4.3 U2.4 X2.P$1 | length 674.3
  Top Layer w10: 1845,575 1862.09,575 ; U2.4 1945,975 1921.5,951.5 C7.2 1921.5,868.5 2000,790 D10.1 D10.1@2075.12,788.03
  Top Layer w40: 1862.09,575 D10.1@2075.12,788.03
NetC7_1: C7.1 U2.2 | length 128.4
  Top Layer w10: U2.2 1845,975 1860,960 1860,906.5 C7.1
NetC8_1: C8.1 U1.2 | length 121.3
  Top Layer w10: U1.2 200,1270 211.5,1281.5 C8.1
NetD1_1: D1.1 R1.2 | length 63.8
  Top Layer w10: R1.2 D1.1
NetD2_1: D2.1 R10.2 | length 63.8
  Top Layer w10: R10.2 D2.1
NetD13_1: D13.1 R4.1 R7.1 | length 323.6
  Top Layer w10: D13.1 558.39,850 625,850 640,865 R7.1 659.68,925.32 668.78,934.41 668.78,1018.5 631.97,1055.32 R4.1@630,1055.32
NetD14_1: D14.1 R5.2 R6.1 | length 467.1
  Top Layer w10: R6.1 1370,1445 v1(1390,1465) 1392.71,1465 1402.44,1474.74 D14.1 ; v1(1415,1215) 1415,1212.29 1424.68,1202.61 R5.2
  Fourth Layer w10: v1(1390,1465) 1390,1462.29 1405,1447.29 v1@1405,1215
NetD16_1: D16.1 R2.1 R8.1 | length 512.2
  Top Layer w10: R2.1 1405.32,1259.36 1420.64,1259.36 v1(1450,1230) ; D16.1 1518.39,963.39 v1(1535,980) R8.1
  Fourth Layer w10: v1(1450,1230) 1470,1210 1470,1045 v1(1535,980)
NetD17_1: D17.1 R3.1 R9.1 | length 461.8
  Top Layer w10: R9.1 612.57,1360 623.09,1370.51 623.09,1388.09 626.91,1391.91 632.9,1391.91 646.61,1405.63 D17.1 ; R3.1 v1(835,1370)
  Fourth Layer w10: v1(625,1390) 706.35,1390 721.35,1405 800,1405 v1(835,1370)
NetQ2_1: Q2.1 R4.2 | length 36
  Top Layer w10: R4.2 630.96,1100.65 664.23,1100.65 Q2.1
NetQ4_1: Q4.1 R5.1 | length 104.5
  Top Layer w10: Q4.1 1351.61,1223.39 1385,1190 R5.1@1385,1158.34
NetR14_1: R14.1 U2.1
NetR15_1: R15.1 U1.1
PWM: I2.1 I3.2 X1.P$1 | length 762
  Top Layer w10: I3.2 850.63,203.46 X1.P$1 845,140 1020.94,315.94 I2.1
pads on no net: I2.3 I2.7 I3.3 I3.7 X1.1 X2.1

## Polygon pours and split planes (outlines as drawn)
M+ on Top Layer "M+_L01_P013" (solid, pour order 13): 680,1265 680,1205 700,1185 700,1070 1055,715 1200,715 1375,540 1585,540 1622.17,502.83 1622.17,247.17 1707.69,100 1780,100 1780,225 1690,315 1690,555 1625,620 1425,620 1235,810 1080,810 800,1090 800,1205 790,1205 750,1245 750,1265
GND on Top Layer "GND_L01_P037" (solid, pour order 37): 5,38.52 5,1525.99 cw(c44.26,1520.25) 50,1559.52 2170,1565.78 cw(c2169.61,1535.39) 2200,1535 2200,41.77 cw(c2174.8,40.46) 2176.12,15.26 50,5 cw(c44.26,44.26)
3.3V on Top Layer "3.3V_L01_P031" (solid, pour order 31): 1115,325 1235,325 1235,390 1210,415 1210,615 1135,690 805,690 805,605 825,585 825,555 835,555 835,595 1125,595 1165,555 1160,550 1160,430 1115,385 1115,330
12V on Top Layer "12V_L01_P003" (solid, pour order 3): 2069.8,315 2074.17,310.63 2074.17,409.37 1910.63,409.37 1910,410 1910,315 1910,410 1910,315
12V on Top Layer "12V_L01_P006" (solid, pour order 6): 1355,490 1358.04,420.63 1365.63,420.63 1515.94,420.63 1515.94,519.37 1384.37,519.37
12V on Top Layer "12V_L01_P021" (solid, pour order 21): 570,1295 660,1385 795,1385 795,1235 570,1235
12V on Top Layer "12V_L01_P036" (solid, pour order 36): 1325,230 1325,80 1380,80 1380,230
M- on Top Layer "M-_L01_P012" (solid, pour order 12): 1815,100 1899.23,100 1890,580 1700,770 1500,770 1295,975 1295,1250 1280,1265 1280,1310 1190,1310 1195,1305 1195,945 1465,675 1675,675 1815,535
12V on Top Layer "12V_L01_P028" (solid, pour order 28): 1365,1130 1560,1130 1560,1065 1555,1060 1470,1060 1430,1020 1365,1020
12V on Top Layer "12V_L01_P026" (solid, pour order 26): 1080,1435 1200,1435 1315,1435 1315,1315 1185,1315 1165,1295 1080,1295
12V on Top Layer "12V_L01_P017" (solid, pour order 17): 470,1060 470,1190 565,1190 565,1060
12V on Top Layer "12V_L01_P015" (solid, pour order 15): 480,495 480,785 360,785 360,495
NetR14_1 on Top Layer "NETR14_1_L01_P007" (solid, pour order 7): 1685,1075 1685,1025 1735,1025 1735,1020 1760,995 1810,995 1810,1060 1780,1060 1765,1075
NetR15_1 on Top Layer "NETR15_1_L01_P010" (solid, pour order 10): 235,1255 235,1190 320,1190 330,1200 380,1200 380,1245 375,1250 325,1250 320,1255
12V on Fourth Layer "12V_L04_P011" (solid, pour order 11): 1385,495 1330,440 1330,140 2070,140 2075,145 2075,495 1385,495 1380,490 1380,140
GND on Fourth Layer "GND_L04_P035" (solid, pour order 35): 5,38.52 5,1525.99 cw(c44.26,1520.25) 50,1559.52 2170,1565.78 cw(c2169.61,1535.39) 2200,1535 2200,41.77 cw(c2174.8,40.46) 2176.12,15.26 50,5 cw(c44.26,44.26)
12V on Fourth Layer "12V_L04_P014" (solid, pour order 14): 360,685 360,865 475,980 475,1200 655,1380 655,1225 555,1125 555,780 505,780 475,750 475,685
12V on Fourth Layer "12V_L04_P032" (solid, pour order 32): 365,550 855,550 1265,140 1380,140 1380,230 1340,230 980,590 365,590 365,565
12V on Fourth Layer "12V_L04_P018" (solid, pour order 18): 1175,1425 1325,1425 1325,1255 1455,1119.09 1455,1005 1360,1005 1140,1225
12V on Fourth Layer "12V_L04_P016" (solid, pour order 16): 649.71,1374.71 700,1425 1175,1425 1175,1260 1140,1225 655,1225
GND on Third Layer "GND_L03_P033" (solid, pour order 33): 5,38.52 5,1525.99 cw(c44.26,1520.25) 50,1559.52 2170,1565.78 cw(c2169.61,1535.39) 2200,1535 2200,41.77 cw(c2174.8,40.46) 2176.12,15.26 50,5 cw(c44.26,44.26)
GND on Second Layer "GND_L02_P034" (solid, pour order 34): 5,38.52 5,1525.99 cw(c44.26,1520.25) 50,1559.52 2170,1565.78 cw(c2169.61,1535.39) 2200,1535 2200,41.77 cw(c2174.8,40.46) 2176.12,15.26 50,5 cw(c44.26,44.26)

## Other copper
Top Layer:
  pour cut-out: 375,525 375,95 495,95 495,525
  pour cut-out: 515,1185 330,1185 330,1135 515,1135
  pour cut-out: 1595,1120 1595,1135 1600,1140 1735,1140 1735,1085 1725,1075 1605,1075 1590,1060 1560,1060 1560,1120

## Silkscreen, mask and mechanical layers (free items; w line width, h text height)
Top Overlay:
  text "H-Bridge V1" at 740,1496.66 h50
  text "M+" at 1722,277 h30
  text "M-" at 1832,277 h30
  text "12V" at 387,262 h30
  text "GND" at 502,262 h30
  text "DIR" at 622,262 h30
  text "PWM" at 737,262 h30
Bottom Overlay:
  drawing of 2348 lines, arcs and shapes, not listed
  text "MK PR EG ZM MC" at 752.91,1129.78 h40
Outline:
  the board outline again, w10